# Altium PCB Template.PcbDoc
Units mil, origin at the board's own origin, x right, y up, seen from the top; angles counter-clockwise.
Board outline 6000 x 4000 mil, 2 copper layers (Top Layer, Bottom Layer); 27 components, 20 nets, 142 pads, 0 vias.
Unrouted connection lines stored in the file: 68.
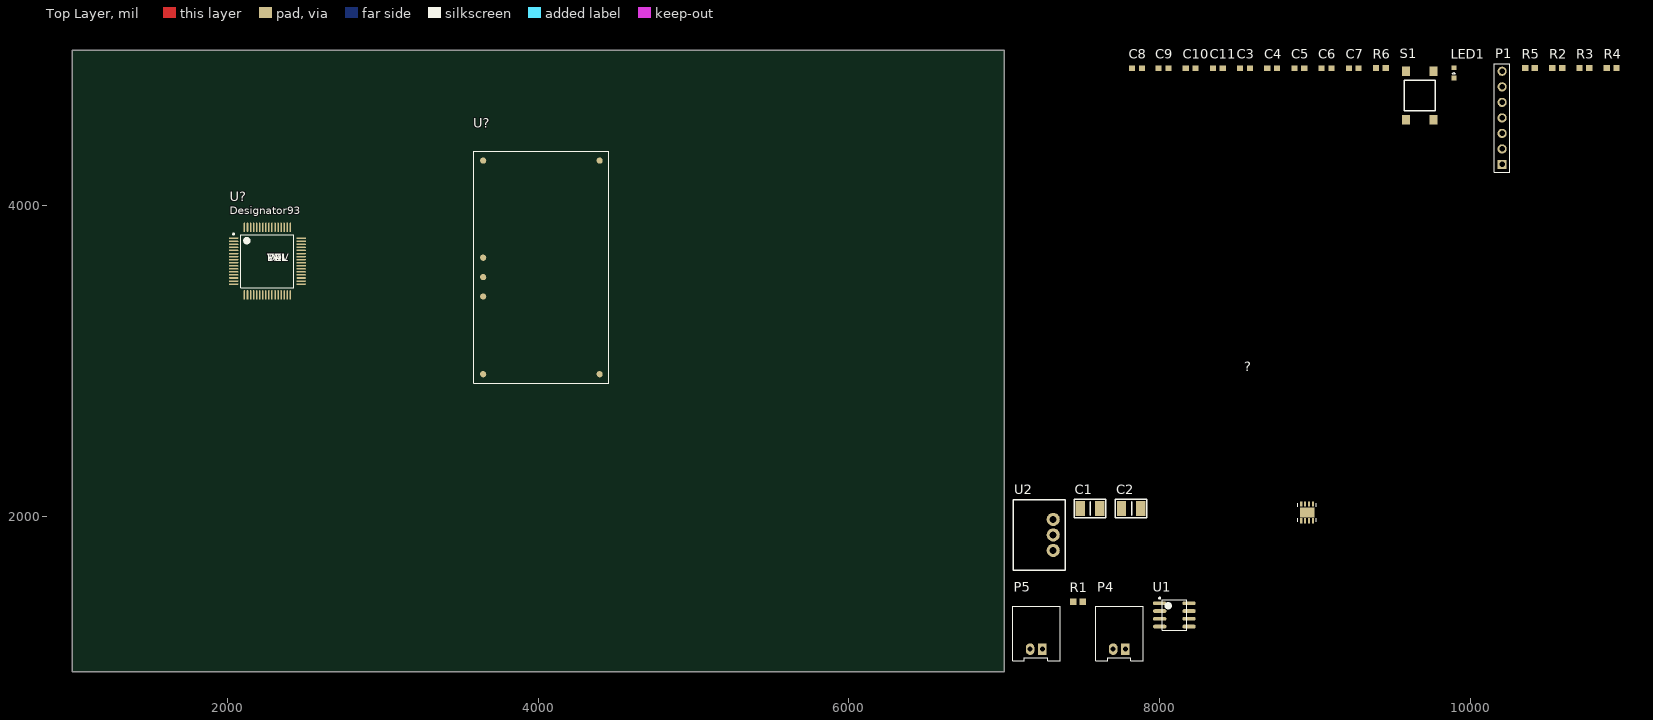
[diagram p0: Top Layer view]
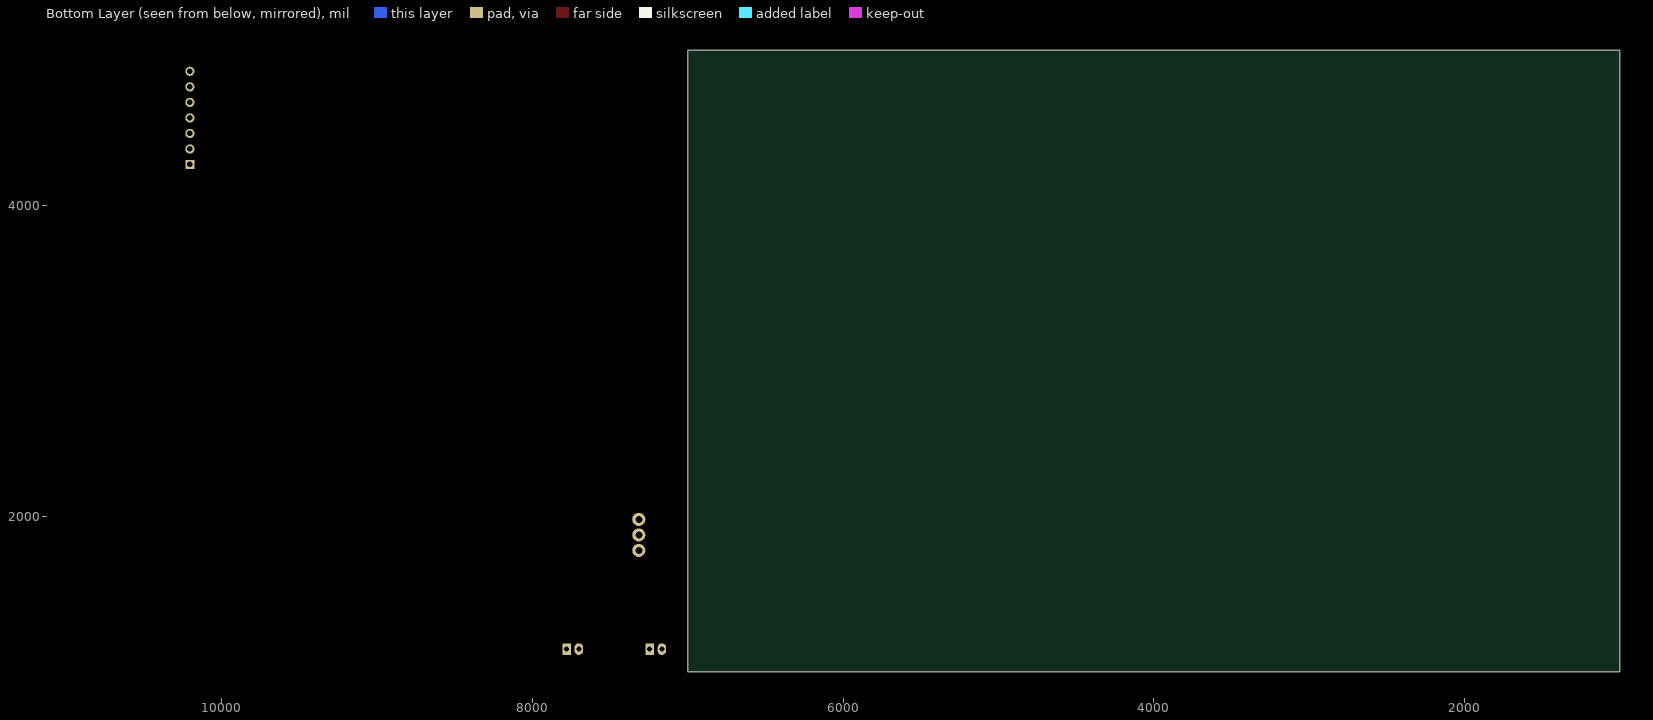
[diagram p1: Bottom Layer view, seen from below]

## Layer stack, top to bottom
Top Solder: solder mask 0.4, Solder Resist, Dk 3.5
Top Layer: signal copper 1.4
Dielectric 1: dielectric 12.6, FR-4, Dk 4.8
Bottom Layer: signal copper 1.4
Bottom Solder: solder mask 0.4, Solder Resist, Dk 3.5

## Board outline
1000,1000 7000,1000 7000,5000 1000,5000

## Design rules (kind name [scope] priority, off if disabled: settings)
Clearance [All] p1: gap=10 ignorepadtopadclearanceinfootprint=FALSE except(0: Arc-Hole Track-Hole SMDPad-Hole THPad-Hole Via-Hole Fill-Hole Poly-Hole Region-Hole Text-Hole)
PolygonConnect [All] p1: connectstyle=Relief reliefconductorwidth=10 reliefentries=4 polygonreliefangle="90 Angle" airgapwidth=10
RoutingVias [All] p1: holewidth=28 width=50 viastyle="Through Hole" minholewidth=28 minwidth=50 maxholewidth=28 maxwidth=50
SolderMaskExpansion [All] p1: expansion=4
Width [All] p1: maxlimit=10 minlimit=10 preferedwidth=10
30 further rules are at their usual default settings.

## Classes and differential pairs
component class RECOM_24to3v3: C1 C2 L? U2
component class Tiva_C_Base: ? C3 C4 C5 C6 C7 C8 C9 C10 C11 C? LED1 P1 R2 R3 R4 R5 R6 R? S1 U?
component class CAN_Connections: P4 P5 R1 U1

## Components (designator, comment, footprint, x,y, rotation, side; value= is the part's Value field where it differs from the comment)
? "MCP4131-XXXX/MF" DFN8_3x3MC 8950,2025 r90 top value=Value
C1 "CAP1210" CAP1210 7615,2050 r0 top value=10uF
C2 "CAP1210" CAP1210 7880,2050 r0 top value=10uF
C3 "Cap" CAPC0603 8550,4885 r0 top value=0.1uF
C4 "Cap" CAPC0603 8725,4885 r0 top value=0.1uF
C5 "Cap" CAPC0603 8900,4885 r0 top value=0.1uF
C6 "Cap" CAPC0603 9075,4885 r0 top value=0.1uF
C7 "Cap" CAPC0603 9250,4885 r0 top value=2.0uF
C8 "Cap" CAPC0603 7855,4885 r0 top value=0.1uF
C9 "Cap" CAPC0603 8025,4885 r0 top value=0.1uF
C10 "Cap" CAPC0603 8200,4885 r0 top value=1.0uF
C11 "Cap" CAPC0603 8375,4885 r0 top value=2.2uF
LED1 "LED" LED0603 9895,4855 r90 top
P1 "Header 7" HDR1X7 10205,4265 r90 top
P4 "2-pin Horz Sherlock" MOLEX-HDR-1X2-SHERLOCK-HORZ 7780,1145 r0 top
P5 "2-pin Horz Sherlock" MOLEX-HDR-1X2-SHERLOCK-HORZ 7245,1145 r0 top
R1 "Res" RES0603 7475,1450 r0 top value=120
R2 "Res" RES0603 10560,4885 r0 top value=10k
R3 "Res" RES0603 10735,4885 r0 top value=10k
R4 "Res" RES0603 10910,4885 r0 top value=10k
R5 "Res" RES0603 10385,4885 r0 top value=1k
R6 "Res" RES0603 9425,4885 r0 top value=10k
S1 "Button" PTS645xxxxSMTR92 9675,4710 r90 top
U1 "SN65HVD230DR" SOIC-8pin 8095,1365 r0 top
U2 "R-78C3.3-1.0" R-78C3.3-1.0 7315,1780 r90 top
U? "Part Number: ptn78020w_euk_7" EUK7 4020,3602.5 r0 top value=Value
U? "TM4C123GH6PMT7R" TM4C123GH6PMT7R_L 2255.79,3642.48 r0 top value=Value

## Footprints (in the part's own frame and the unit in brackets; to place one, negate y for a bottom-side part, rotate by r counter-clockwise, add the part's x,y. Pads: shape width x height; smd on the part's side, far side on the other; paste and mask are expansions set on the pad)
CAP1210 [mm]
  rect 1.5x2.5 smd: 1(-0.02,0) 2(-3.2,0)
  silkscreen extent -4.2,-1.48 0.97,1.48, body extent -3.22,-1.25 0,1.26, height 2.5
CAPC0603 [mm] "Chip Capacitor, 2-Leads, Body 1.60x0.80mm, IPC Medium Density"
  rect 1x0.95 smd: 1(-0.8,0) 2(0.8,0)
  body extent -0.88,-0.48 0.87,0.48, height 0.8
DFN8_3x3MC [mil]
  rect 34x14 smd: 1(-54.06,38.39) 2(-54.06,12.8) 3(-54.06,-12.8) 4(-54.06,-38.39) 5(54.06,-38.39) 6(54.06,-12.8) 7(54.06,12.8) 8(54.06,38.39)
  rect 63x95 smd: 9(0,0)
  silkscreen extent -59,-59 59,59, body extent -35,-50 35,50, height 20
EUK7 [mil]
  round 40 smd: 1(375,-687.5) 2(-375,-687.5) 3(-375,-187.5) 4(-375,-62.5) 5(-375,62.5) 6(-375,687.5) 7(375,687.5)
  silkscreen extent -435,-748 435,748, body extent -430,-795 490,745, height 117
HDR1X7 [mm] "Connector; Header; 7 Position"
  rect 1.5x1.5 hole 0.9: 1(0,0)
  round 1.5 hole 0.9: 2(2.54,0) 3(5.08,0) 4(7.62,0) 5(10.16,0) 6(12.7,0) 7(15.24,0)
  silkscreen extent -1.27,-1.27 16.51,1.27
LED0603 [mm] "Chip LED, 2-Leads, Body 1.60x0.80mm, IPC Medium Density"
  rect 0.8x0.8 smd: A(-0.825,0) C(0.825,0)
  silkscreen extent -0.13,-0.25 0.12,0.25, body extent -0.88,-0.48 0.87,0.47, height 0.8
MOLEX-HDR-1X2-SHERLOCK-HORZ [mm]
  rect 1.397x1.905 hole 0.8: 1(0,0)
  oval 1.397x1.905 hole 0.8: 2(-2,0)
  silkscreen extent -4.83,-1.91 2.92,6.98, body extent -4.83,-1.91 2.87,8.59, height 5.54
PTS645xxxxSMTR92 [mm] "PTS645 Series SMT 6 mm Tactile Switch"
  rect 1.555x1.3 smd: A(-3.975,2.25) A(3.975,2.25) B(-3.975,-2.25) B(3.975,-2.25)
  silkscreen extent -2.5,-2.5 2.5,2.5, body extent -3,-3 3,3, height 4.5
R-78C3.3-1.0 [mm] "CONV DC/DC 1A 3.3V OUT SIP VERT"
  round 2.15 hole 1.15: 1(0,0) 2(2.54,0) 3(5.08,0)
  silkscreen extent -3.21,-2 8.29,6.5, body extent -3.3,-2.03 8.38,6.6, height 10.4
RES0603 [mm] "Chip Resistor, 2-Leads, Body 1.60x0.80mm, IPC Medium Density"
  rect 1.05x1 smd: 1(-0.8,0) 2(0.8,0)
  body extent -0.88,-0.48 0.87,0.47, height 0.8
SOIC-8pin [mm] "For 296-1345-1-ND"
  oval 2.2x0.6 smd: 1(-2.4,1.905) 2(-2.4,0.635) 3(-2.4,-0.635) 4(-2.4,-1.905) 5(2.4,-1.905) 6(2.4,-0.635) 7(2.4,0.635) 8(2.4,1.905)
  silkscreen extent -2.52,-2.5 2,2.88, body extent -2,-2.5 2,2.5, height 1.75
TM4C123GH6PMT7R_L [mm]
  oval 1.55x0.25 smd paste-0.102 mask+0.051: 1(-5.525,3.75) 2(-5.525,3.25) 3(-5.525,2.75) 4(-5.525,2.25) 5(-5.525,1.75) 6(-5.525,1.25) 7(-5.525,0.75) 8(-5.525,0.25) 9(-5.525,-0.25) 10(-5.525,-0.75) 11(-5.525,-1.25) 12(-5.525,-1.75) 13(-5.525,-2.25) 14(-5.525,-2.75) 15(-5.525,-3.25) 16(-5.525,-3.75) 33(5.525,-3.75) 34(5.525,-3.25) 35(5.525,-2.75) 36(5.525,-2.25) 37(5.525,-1.75) 38(5.525,-1.25) 39(5.525,-0.75) 40(5.525,-0.25) 41(5.525,0.25) 42(5.525,0.75) 43(5.525,1.25) 44(5.525,1.75) 45(5.525,2.25) 46(5.525,2.75) 47(5.525,3.25) 48(5.525,3.75)
  oval 0.25x1.55 smd paste-0.102 mask+0.051: 17(-3.75,-5.525) 18(-3.25,-5.525) 19(-2.75,-5.525) 20(-2.25,-5.525) 21(-1.75,-5.525) 22(-1.25,-5.525) 23(-0.75,-5.525) 24(-0.25,-5.525) 25(0.25,-5.525) 26(0.75,-5.525) 27(1.25,-5.525) 28(1.75,-5.525) 29(2.25,-5.525) 30(2.75,-5.525) 31(3.25,-5.525) 32(3.75,-5.525) 49(3.75,5.525) 50(3.25,5.525) 51(2.75,5.525) 52(2.25,5.525) 53(1.75,5.525) 54(1.25,5.525) 55(0.75,5.525) 56(0.25,5.525) 57(-0.25,5.525) 58(-0.75,5.525) 59(-1.25,5.525) 60(-1.75,5.525) 61(-2.25,5.525) 62(-2.75,5.525) 63(-3.25,5.525) 64(-3.75,5.525)
  silkscreen extent -5.65,-4.35 4.35,4.55, body extent 0,0 0.25,0.25, height 0.25

## Part data
?: "No Description Available", Copyright="Copyright (C) 2018 Accelerated Designs. All rights reserved", RefDes=RefDes, Type=DEV
C1 C2: "CAP CER 10UF 50V 20% X5R 1210", Supplier Part Number 1=CGA6P1X7R1N106K250AC, Supplier 1=Digi-Key
C3 C4 C5 C6 C7 C8 C9 C10 C11: Supplier Part Number 1=1276-1000-1-ND, Supplier 1=Digi-Key
LED1: Color=Green, Supplier Part Number 1=754-1122-1-ND, Supplier 1=Digi-Key
P1: "Header, 7-Pin", LatestRevisionDate=17-Jul-2002, LatestRevisionNote="Re-released for DXP Platform.", Publisher="Altium Limited"
P4 P5: library part MOLEX-HDR-1x2-SHERLOCK_RA, "Header, Molex, 2mm Pitch Sherlock Header, Single Row, Horizontal, 2 Circuits, Length 3.3mm,  0353630260", Manufacturer="Molex Inc", Manufacturer Part Number=0353630260, Supplier Part Number 1=WM18931-ND, Supplier 1=Digi-Key
R1 R2 R3 R4 R5 R6: Supplier Part Number 1=RMCF0603JT10K0CT-ND, Supplier 1=Digi-Key
S1: "SPST Button", Supplier Part Number 1=CKN9087CT-ND, Supplier 1=Digi-Key
U1: "IC TXRX CAN 1MBPS 3.3V 8SOIC", Supplier Part Numbe 1=296-11654-1-ND, Supplier 1=Digi-Key
U2: "CONV DC/DC 1A 3.3V OUT SIP VERT", Supplier Part Number 1=945-1394-5-ND, Supplier 1=Digi-Key
U?: library part PTN78020W_EUK_7, "6-A Wide-Input Voltage Adjustable Switching Regulator", Manufacturer="Texas Instruments", Manufacturer_Part_Number=ptn78020w_euk_7, PACKAGE_DESIGNATOR=EUK, Copyright="Copyright (C) 2018 Accelerated Designs. All rights reserved", Datasheet_URL=http://www.ti.com/lit/gpn/PTN78020W, FAMILY_NAME="NON-ISOLATED POL", GENERIC_PART_NUMBER=PTN78020W, INDUSTRY_STD_PKG_TYPE="Through-Hole Module", PIN_COUNT=7, RefDes=RefDes, Type=DEV, Vendor="Texas Instruments"
U?: "Imported", Alternate_PartNumber=TM4C123GH6PMT, Manufacturer="Texas Instruments", PartNumber=TM4C123GH6PMTR, CompType=IC, MountType=SMT, PackageReference=PM0064A, PIN_COUNT=64, RefDes=RefDes, RoHS=Y, Type=TYPE

## Nets (pads, with @x,y where several pads share a name; then routed paths per layer and width w, separated by ;. In a path a pad name is that pad's centre, name@x,y a point inside that pad or via, vN(x,y) a via of type N, cw(c..) or ccw(c..) an arc to the next point about the centre after c; other vN are vias at no path point)
24V: C1.1
CAN0_RX: U1.4 U?.28
CAN0_TX: U?.31
CAN_TX: U1.1
CANH: P4.2 P5.2 R1.2 U1.7
CANL: P4.1 P5.1 R1.1 U1.6
GND: C1.2 C2.2 C3.2 C4.2 C5.2 C6.2 C7.2 C8.2 C9.2 C10.2 C11.2 LED1.C P1.7 R6.2 S1.B U1.2 U1.8 U2.2 U?.3@2038.27,3750.75 U?.12 U?.27 U?.32 U?.33 U?.34 U?.35 U?.39 U?.40 U?.55
NetC2_1: C2.1 U2.1
NetLED1_A: LED1.A R5.2
RST_N: P1.5 R2.2 S1.A U?.38
SPIChipSelect: U?.20
SPICLK: U?.19
SPIRx: U?.21
SPITx: U?.22
TCK/SWCLK: P1.1 R3.2 U?.52
TDI: P1.4 U?.50
TDO/SWO: P1.3 R6.1 U?.49
TMS/SWDIO: P1.2 R4.2 U?.51
VDD: C3.1 C4.1 C5.1 C6.1 C7.1 P1.6 R2.1 R3.1 R4.1 R5.1 U1.3 U2.3 U?.2@2038.27,3770.43 U?.11 U?.26 U?.37 U?.42 U?.54
VDDC: C8.1 C9.1 C10.1 C11.1 U?.25 U?.56
pads on no net: ?.1 ?.2 ?.3 ?.4 ?.5 ?.6 ?.7 ?.8 ?.9 U1.5 U?.1 U?.2@3645,2915 U?.3@3645,3415 U?.4 U?.5 U?.6 U?.7 U?.8 U?.9 U?.10 U?.13 U?.14 U?.15 U?.16 U?.17 U?.18 U?.23 U?.24 U?.29 U?.30 U?.36 U?.41 U?.43 U?.44 U?.45 U?.46 U?.47 U?.48 U?.53 U?.57 U?.58 U?.59 U?.60 U?.61 U?.62 U?.63 U?.64

## Text inside footprints (layer, text, board x,y; h text height)
?: Mechanical 7 "Default Padstyle: RX34Y14D0T" at 9384.06,1675 h50 r90; Mechanical 7 "Alt 1 Padstyle: OX60Y90D30P" at 9459.06,1687.5 h50 r90; Mechanical 7 "Alt 2 Padstyle: OX90Y60D30P" at 9534.06,1687.5 h50 r90; Mechanical 7 "2.559055E-02in/.65mm" at 8936.91,1600.94 h25 r90
U?: Top Overlay "DEV" at 2255.79,3642.48 h50; Top Overlay "PN" at 2255.79,3642.48 h50; Top Overlay "VAL" at 2255.79,3642.48 h50; Top Overlay "TOL" at 2255.79,3642.48 h50; Top Overlay "Designator93" at 2012.79,3945.48 h50
U?: Mechanical 7 "Default Padstyle: EX40Y40D0T" at 3670,2655 h50; Mechanical 7 "1.495in/37.973mm" at 4625,3590 h25